# Altium PCB GeekIMU.PcbDoc
Units mil, origin at the board's own origin, x right, y up, seen from the top; angles counter-clockwise.
Board outline 1150.03 x 1090.03 mil, 2 copper layers (Top Layer, Bottom Layer); 41 components, 56 nets, 194 pads, 85 vias.
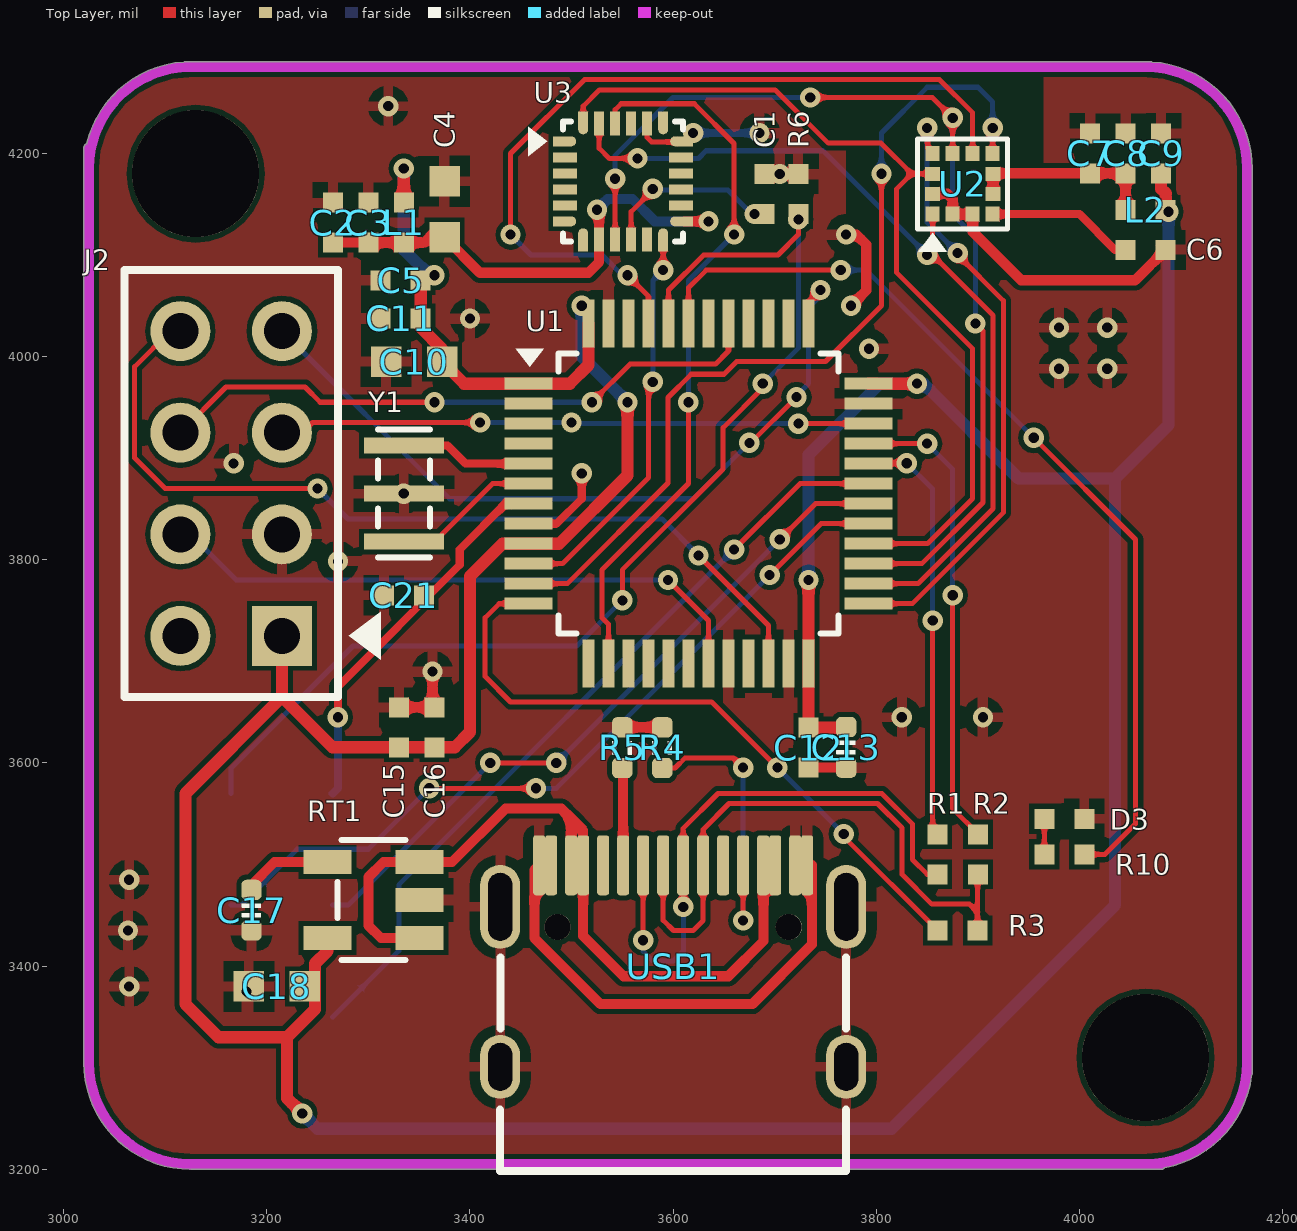
[diagram p0: Top Layer view]
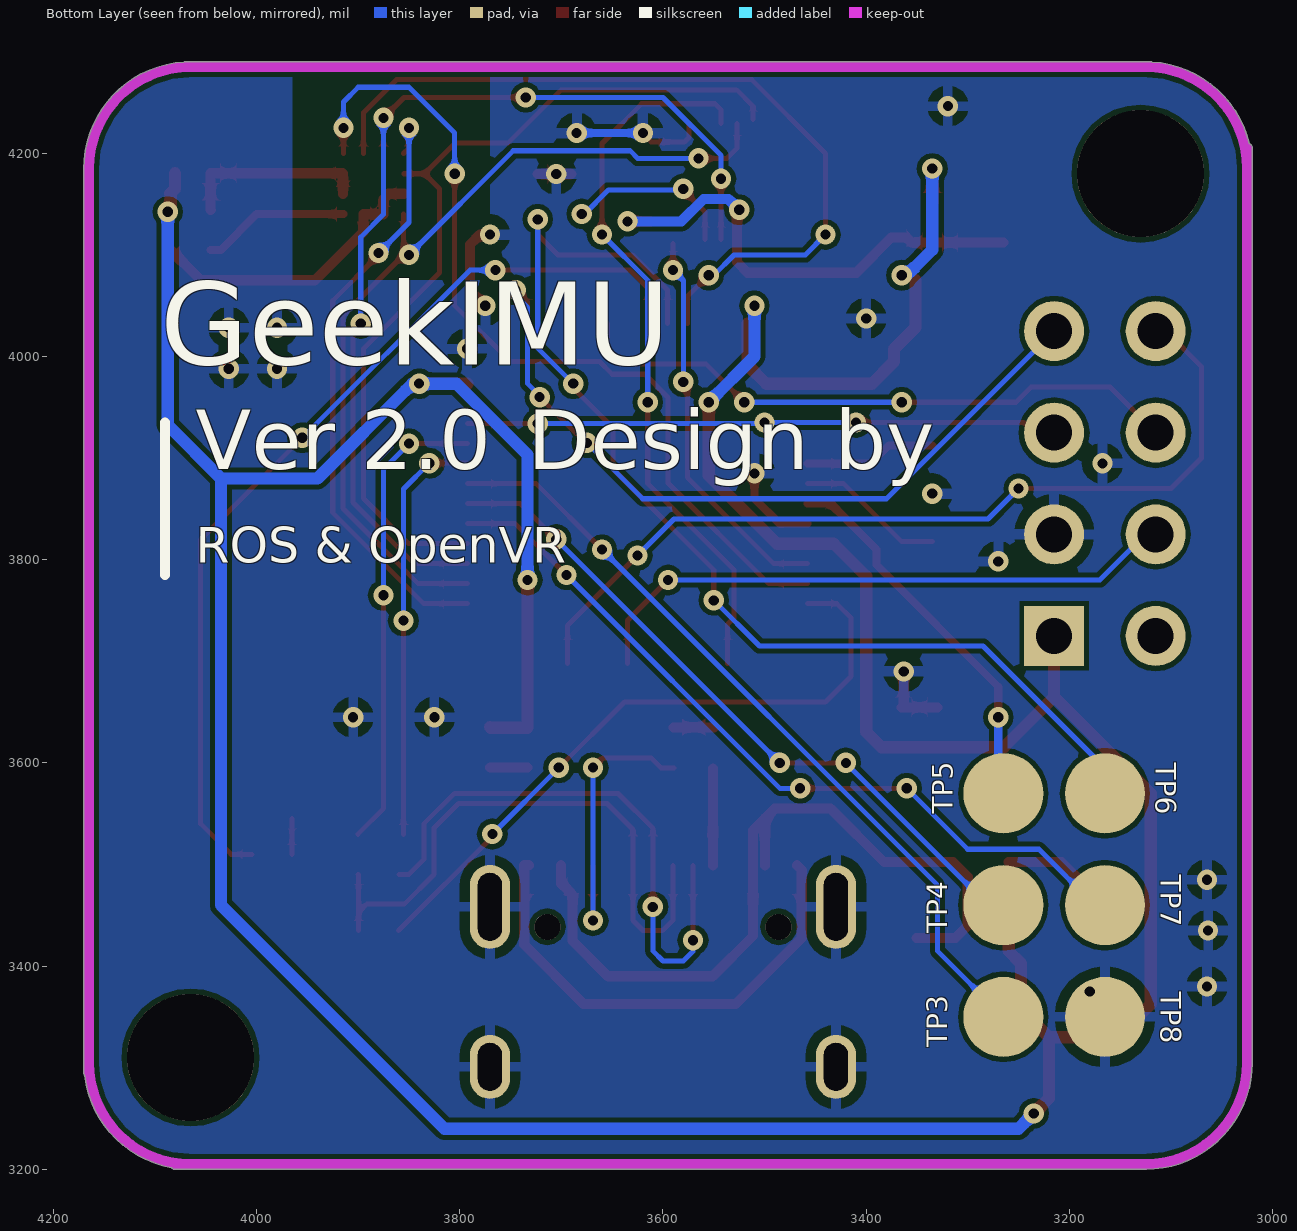
[diagram p1: Bottom Layer view, seen from below]
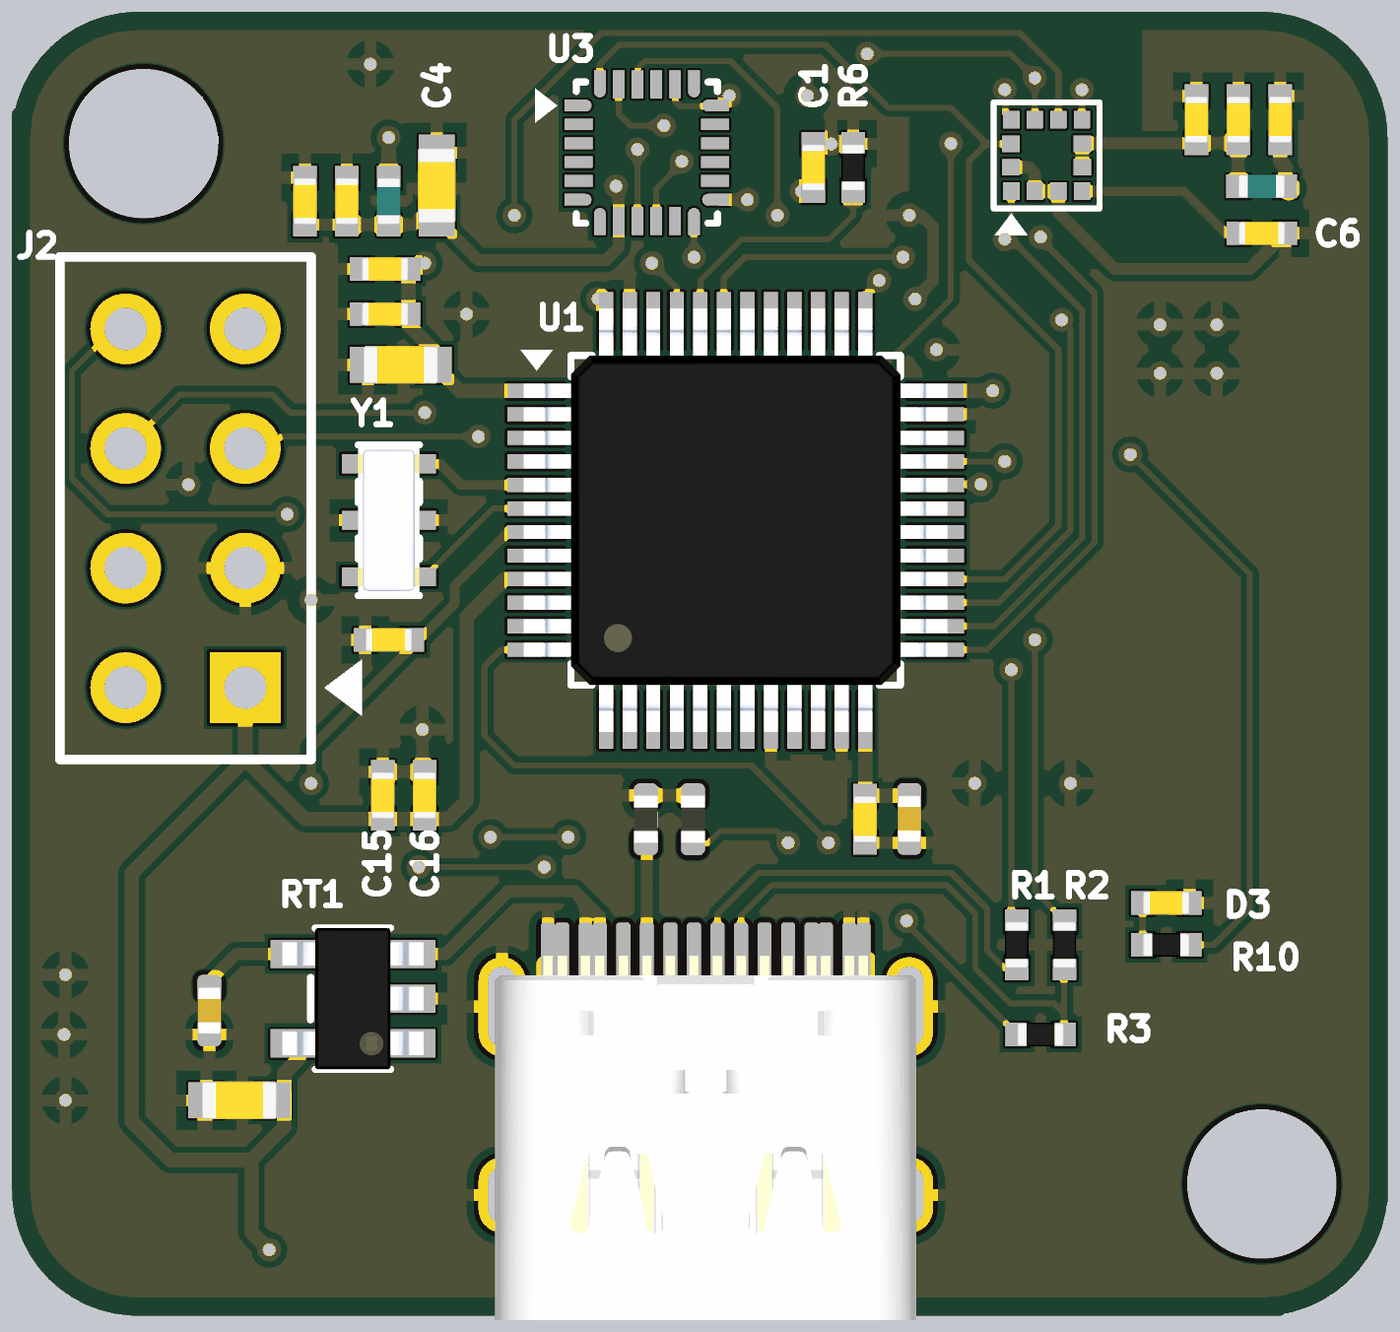
[diagram p2: 3D render of the assembled board from above, using the file's embedded part models]

## Layer stack, top to bottom
Top Solder: solder mask 0.4, Solder Resist, Dk 3.5
Top Layer: signal copper 1.4
Dielectric1: dielectric 12.6, FR-4, Dk 4.8
Bottom Layer: signal copper 1.4
Bottom Solder: solder mask 0.4, Solder Resist, Dk 3.5

## Board outline
3019.99,3305 3019.99,4205 cw(c3025,4205) 3022.9,4209.55 cw(c3125,4185) 3118.62,4289.82 cw(c3120,4285) 3120,4290.02 4070,4290.02 cw(c4070,4285) 4071.38,4289.82 cw(c4065,4185) 4170.02,4185 4170.02,3295 cw(c4165,3295) 4169.25,3292.34 cw(c4065,3305) 4083.75,3201.67 cw(c4080,3205) 4080,3199.99 3125,3199.99 cw(c3125,3305)

## Design rules (kind name [scope] priority, off if disabled: settings)
Clearance [All] p1: gap=5 ignorepadtopadclearanceinfootprint=FALSE except(0: Arc-Hole Track-Hole SMDPad-Hole THPad-Hole Via-Hole Fill-Hole Poly-Hole Region-Hole Text-Hole)
DiffPairsRouting [All] p1: maxlimit=20 minlimit=5 mostfreqgap=5 toplayer_minwidth=15 toplayer_maxwidth=15 toplayer_prefwidth=15 bottomlayer_minwidth=15 bottomlayer_maxwidth=15 bottomlayer_prefwidth=15 maxuncoupledlength=500
FabricationTestpoint [(IsPad And (OnTopLayer Or OnBottomLayer))] p1: side=3 testpointundercomponent=TRUE minsize=40 maxsize=100 preferedsize=60 minholesize=0 maxholesize=40 preferedholesize=32 testpointgrid=1 allowsidetop=TRUE allowsidebottom=TRUE usegrid=TRUE gridtolerance=0.01
HoleSize [All] p1: absolutevalues=TRUE maxlimit=135 minlimit=1 maxpercent=80.000 minpercent=20.000
MinimumSolderMaskSliver [All] p1: minsoldermaskwidth=1
PolygonConnect [All] p1: connectstyle=Relief reliefconductorwidth=10 reliefentries=4 polygonreliefangle="90 Angle" airgapwidth=10
RoutingVias [All] p1: holewidth=8 width=18 viastyle="Through Hole" minholewidth=8 minwidth=8 maxholewidth=50 maxwidth=50
SilkToSilkClearance [All] p1: silktosilkclearance=0
SilkToSolderMaskClearance SilkscreenOverComponentPads [IsPad] p1: minsilkscreentomaskgap=0 clearancetoexposedcopper=TRUE
SolderMaskExpansion [All] p1: expansion=4
Width [All] p1: maxlimit=30 minlimit=5 preferedwidth=10 minimp=50.000000 maximp=50.000000 favimp=50.000000
24 further rules are at their usual default settings.

## Classes and differential pairs
component class MCU: C10 C11 C12 C13 C15 C16 C21 D3 R6 R10 TP3 TP4 TP5 TP6 TP7 U1 Y1
component class Power: C17 C18 RT1
component class Sensor: C1 C2 C3 C4 C5 C6 C7 C8 C9 L1 L2 U2 U3
component class USB: J2 R1 R2 R3 R4 R5 TP8 USB1

## Components (designator, comment, footprint, x,y, rotation, side; value= is the part's Value field where it differs from the comment)
C1 "0.1uF" CAP_CERAMIC_0402 3690,4160 r90 top
C2 "0.01uF" CAP_CERAMIC_0402 3265,4131.81 r90 top
C3 "0.1uF" CAP_CERAMIC_0402 3299.95,4131.81 r90 top
C4 "10uF" CAP_CERAMIC_0603 3375,4144.84 r90 top
C5 "0.1uF" CAP_CERAMIC_0402 3331.86,4075 r180 top
C6 "0.1uF" CAP_CERAMIC_0402 4065,4105 r0 top
C7 "0.1uF" CAP_CERAMIC_0402 4010.31,4200 r90 top
C8 "1uF" CAP_CERAMIC_0402 4045.31,4200 r90 top
C9 "0.1uF" CAP_CERAMIC_0402 4080.31,4200 r90 top
C10 "10uF" CAP_CERAMIC_0603 3345,3995 r180 top
C11 "0.1uF" CAP_CERAMIC_0402 3331.86,4037.42 r180 top
C12 "0.1uF" CAP_CERAMIC_0402 3733.27,3615 r270 top
C13 "0.1uF" CAP_0402 3770.28,3615.32 r90 top
C15 "1uF" CAP_CERAMIC_0402 3330,3635 r90 top
C16 "0.1uF" CAP_CERAMIC_0402 3365,3635 r90 top
C17 "Cap" CAP_0402 3185,3455 r90 top value=0.1uf
C18 "Cap" CAP_0603 3210,3380 r0 top value=10uf
C21 "0.1uF" CAP_CERAMIC_0402 3335,3765 r180 top
D3 "LED1" CAP_CERAMIC_0402 3985,3545 r0 top
J2 "4-103240-0-04" 4-103240-0-04 3215,3725 r90 top
L1 "MMZ1005S601C" INDUCTOR_0402 3334.89,4131.81 r90 top
L2 "MMZ1005S601C" INDUCTOR_0402 4064.84,4144.21 r0 top
R1 "22 ohm" RESISTOR_0402 3860,3510 r90 top
R2 "22 ohm" RESISTOR_0402 3900,3510 r90 top
R3 "1.5K" RESISTOR_0402 3880,3435 r180 top
R4 "5.1K" RES_0402 3589.37,3615 r90 top
R5 "5.1K" RES_0402 3550,3615 r270 top
R6 "10K" RESISTOR_0402 3723.23,4160 r270 top
R10 "" RESISTOR_0402 3985,3510 r0 top value=10K
RT1 "RT9193" SOT23-5L 3305,3465 r180 top
TP3 "TEST POINT" TEST_POINT_PAD 3265,3350 r0 bottom
TP4 "TEST POINT" TEST_POINT_PAD 3265,3460 r0 bottom
TP5 "TEST POINT" TEST_POINT_PAD 3265,3570 r0 bottom
TP6 "TEST POINT" TEST_POINT_PAD 3165,3570 r90 bottom
TP7 "TEST POINT" TEST_POINT_PAD 3165,3460 r90 bottom
TP8 "TEST POINT" TEST_POINT_PAD 3165,3350 r180 bottom
U1 "STM32F103C8T6" LQFP48 3625,3865 r0 top
U2 "LIS3MDL" LGA-12 3885,4170 r90 top
U3 "MPU-6500" QFN-24 3550.79,4172.4 r0 top
USB1 "Type-C" Type-C-TOP 3600,3400 r270 top
Y1 "CSTCE8M00G55-R0" CSTCE 3335,3865 r90 top

## Footprints (in the part's own frame and the unit in brackets; to place one, negate y for a bottom-side part, rotate by r counter-clockwise, add the part's x,y. Pads: shape width x height; smd on the part's side, far side on the other; paste and mask are expansions set on the pad)
4-103240-0-04 [mm]
  rect 1.5x1.5 hole 0.9 mask+0.076: 1(0,0)
  round 1.5 hole 0.9 mask+0.076: 2(0,2.54) 3(2.54,0) 4(2.54,2.54) 5(5.08,0) 6(5.08,2.54) 7(7.62,0) 8(7.62,2.54)
  silkscreen extent -1.52,-2.48 9.15,3.94
CAP_0402 [mil]
  rrect50% 20x20 smd: 1(-20,0) 2(20,0)
  silkscreen extent -7,-9 7,9, body extent -20,-10 20,10, height 20
CAP_0603 [mil]
  rect 30x30 smd mask+2: 1(-27.56,0) 2(27.56,0)
  body extent -31,-16 31,16, height 22
CAP_CERAMIC_0402 [mm]
  rect 0.5x0.5 smd mask+0.051: 1(-0.5,0) 2(0.5,0)
  body extent -0.5,-0.25 0.5,0.25, height 0.56
CAP_CERAMIC_0603 [mil]
  rect 30x30 smd mask+2: 1(-27.56,0) 2(27.56,0)
  body extent -31,-16 31,16, height 22
CSTCE [mm]
  rect 0.4x2 smd mask+0.064: 1(-1.2,0) 2(0,0) 3(1.2,0)
  silkscreen extent -1.6,-0.65 1.6,0.65, body extent -1.6,-0.65 1.6,0.65, height 0.7
INDUCTOR_0402 [mm]
  rect 0.5x0.5 smd mask+0.051: 1(-0.5,0) 2(0.5,0)
  body extent -0.5,-0.25 0.5,0.25, height 0.6
LGA-12 [mm]
  rect 0.375x0.35 smd mask+0.051: 1(-0.76,0.75) 2(-0.76,0.25) 3(-0.76,-0.25) 4(-0.76,-0.75) 7(0.76,-0.75) 8(0.76,-0.25) 9(0.76,0.25) 10(0.76,0.75)
  rect 0.35x0.375 smd mask+0.051: 5(-0.25,-0.76) 6(0.25,-0.76) 11(0.25,0.76) 12(-0.25,0.76)
  silkscreen extent -1.7,-1.12 1.13,1.13, body extent -1,-1 1,1, height 1
LQFP48 [mm]
  rect 1.2x0.3 smd mask+0.064: 1(-4.25,2.75) 2(-4.25,2.25) 3(-4.25,1.75) 4(-4.25,1.25) 5(-4.25,0.75) 6(-4.25,0.25) 7(-4.25,-0.25) 8(-4.25,-0.75) 9(-4.25,-1.25) 10(-4.25,-1.75) 11(-4.25,-2.25) 12(-4.25,-2.75) 25(4.25,-2.75) 26(4.25,-2.25) 27(4.25,-1.75) 28(4.25,-1.25) 29(4.25,-0.75) 30(4.25,-0.25) 31(4.25,0.25) 32(4.25,0.75) 33(4.25,1.25) 34(4.25,1.75) 35(4.25,2.25) 36(4.25,2.75)
  rect 0.3x1.2 smd mask+0.064: 13(-2.75,-4.25) 14(-2.25,-4.25) 15(-1.75,-4.25) 16(-1.25,-4.25) 17(-0.75,-4.25) 18(-0.25,-4.25) 19(0.25,-4.25) 20(0.75,-4.25) 21(1.25,-4.25) 22(1.75,-4.25) 23(2.25,-4.25) 24(2.75,-4.25) 37(2.75,4.25) 38(2.25,4.25) 39(1.75,4.25) 40(1.25,4.25) 41(0.75,4.25) 42(0.25,4.25) 43(-0.25,4.25) 44(-0.75,4.25) 45(-1.25,4.25) 46(-1.75,4.25) 47(-2.25,4.25) 48(-2.75,4.25)
  silkscreen extent -4.58,-3.5 3.5,3.62, body extent -4.5,-4.5 4.5,4.5, height 1.5
QFN-24 [mm]
  rect 0.4x0.25 smd mask+0.05: 1(-1.55,1) 6(-1.55,-1) 13(1.55,-1) 18(1.55,1)
  rrect100% 0.35x0.25 smd mask+0.05: 1(-1.35,1) 6(-1.35,-1) 13(1.35,-1) 18(1.35,1)
  rect 0.6x0.25 smd mask+0.05: 2(-1.45,0.6) 3(-1.45,0.2) 4(-1.45,-0.2) 5(-1.45,-0.6) 14(1.45,-0.6) 15(1.45,-0.2) 16(1.45,0.2) 17(1.45,0.6)
  rect 0.25x0.4 smd mask+0.05: 7(-1,-1.55) 12(1,-1.55) 19(1,1.55) 24(-1,1.55)
  rrect100% 0.25x0.35 smd mask+0.05: 7(-1,-1.35) 12(1,-1.35) 19(1,1.35) 24(-1,1.35)
  rect 0.25x0.6 smd mask+0.05: 8(-0.6,-1.45) 9(-0.2,-1.45) 10(0.2,-1.45) 11(0.6,-1.45) 20(0.6,1.45) 21(0.2,1.45) 22(-0.2,1.45) 23(-0.6,1.45)
  silkscreen extent -2.37,-1.5 1.5,1.5, body extent -1.5,-1.5 1.5,1.5, height 0.9
RES_0402 [mil]
  rrect50% 20x20 smd: 1(-20,0) 2(20,0)
  silkscreen extent -7,-10 7,10, body extent -20,-10 20,10, height 14
RESISTOR_0402 [mm]
  rect 0.5x0.5 smd mask+0.051: 1(-0.5,0) 2(0.5,0)
  body extent -0.5,-0.25 0.5,0.25, height 0.38
SOT23-5L [mm]
  rect 1.2x0.6 smd mask+0.051: 1(-1.15,0.95) 2(-1.15,0) 3(-1.15,-0.95) 4(1.15,-0.95) 5(1.15,0.95)
  silkscreen extent -0.8,-1.5 0.9,1.5, body extent -1.5,-1.5 1.5,1.5, height 1.3
TEST_POINT_PAD [mm]
  round 2 smd mask+0.064: 1(0,0)
Type-C-TOP [mm]
  round 0.65 hole 0.65: 0(-0.98,2.89) 0(-0.98,-2.89)
  oval 1.6x1 hole 0.6 slot 1.2 at 0 deg: 1(2.52,4.325) 2(2.52,-4.325)
  oval 2.1x1 hole 0.6 slot 1.7 at 0 deg: 3(-1.48,-4.325) 4(-1.48,4.325)
  rrect50% 1.5x0.3 smd: A1(-2.52,-3.35) A4(-2.52,-2.55) A5(-2.52,-1.25) A6(-2.52,-0.25) A7(-2.52,0.25) A8(-2.52,1.25) A9(-2.52,2.55) A12(-2.52,3.35) B1(-2.52,3.05) B4(-2.52,2.25) B5(-2.52,1.75) B6(-2.52,0.75) B7(-2.52,-0.75) B8(-2.52,-1.75) B9(-2.52,-2.25) B12(-2.52,-3.05)
  silkscreen extent -0.22,-4.33 5.12,4.33, body extent -2.57,-4.48 5.18,4.47, height 3.26

## Part data
C1 C3 C5 C6 C7 C9 C11 C12 C13 C16 C21: library part "CAP, CERAMIC", "CAP, CERAMIC, 0.1uF, ?0%, 16V, X7R, 0402", Dielectric=X7R, Manufacturer="MURATA ELECTRONICS", Package=0402, Part Number=GRM155R71C104KA88D, Tolerance=?0%, Voltage=16V
C2: library part "CAP, CERAMIC", "CAP, CERAMIC, 0.01uF, ?0%, 25V, X7R, 0402", Dielectric=X7R, Manufacturer="MURATA ELECTRONICS", Package=0402, Part Number=GRM155R71E103KA01D, Tolerance=?0%, Voltage=25V
C4 C10: library part "CAP, CERAMIC", "CAP, CERAMIC, 10uF, ?0%, 6.3V, X5R, 0603", Dielectric=X5R, Manufacturer="MURATA ELECTRONICS", Package=0603, Part Number=GRM188R60J106ME47D, Tolerance=?0%, Voltage=6.3V
C8 C15: library part "CAP, CERAMIC", "CAP, CERAMIC, 1uF, ?0%, 10V, X5R, 0402", Dielectric=X5R, Manufacturer="MURATA ELECTRONICS", Package=0402, Part Number=GRM155R61A105KE15D, Tolerance=?0%, Voltage=10V
C17 C18: "Capacitor", LatestRevisionDate=17-Jul-2002, LatestRevisionNote="Re-released for DXP Platform.", PackageDescription="Radial Cap, Thru-Hole; 2 Leads; 0.3 in Pin Spacing", PackageReference=RAD-0.3, Published=8-Jun-2000, Publisher="Altium Limited"
D3: "Typical RED GaAs LED", LatestRevisionDate=08-Jul-2005, LatestRevisionNote="Mech Layer 1 removed.", PackageReference=LED-1, Published=8-Jun-2000, Publisher="Altium Limited"
J2: "CONNECTOR, HEADER, 2X4, 0.1\" PITCH", Manufacturer="TE CONNECTIVITY", Part Number=4-103240-0-04, Pitch="0.1\""
L1 L2: library part INDUCTOR, "FERRITE CHIP BEAD, 600 OHM @ 100MHz, 300mA, 0402", Manufacturer="TDK CORPORATION", Package=0402, Part Number=MMZ1005S601C
R1 R2: library part RESISTOR, "RES, 22 OHM, 1/10W, ?%, 0402", Manufacturer=PANASONIC, Package=0402, Part Number=ERJ-2RKF22R0X, Power Rating=1/10W, Tolerance=?%
R3: library part RESISTOR, "RES, 1.5K OHM, 1/10W, ?%, 0402", Manufacturer=PANASONIC, Package=0402, Part Number=ERJ-2RKF1501X, Power Rating=1/10W, Tolerance=?%
R4: library part RESISTOR, "RES, 1.5K OHM, 1/10W, ?%, 0402", Manufacturer=PANASONIC, Package=0402, Part Number=ERJ-2RKF1501X, Power Rating=1/10W, Tolerance=10%
R5: library part RESISTOR, "RES, 1.5K OHM, 1/10W, ?%, 0402", Manufacturer=PANASONIC, Package=0402, Part Number=ERJ-2RKF1501X, Power Rating=1/10W, 误差=10%
R6: library part RESISTOR, "RES, 10K OHM, 1/10W, ?%, 0402", Manufacturer=PANASONIC, Package=0402, Part Number=ERJ-2RKF1002X, Power Rating=1/10W, Tolerance=?%
R10: library part Res2, "Resistor", LatestRevisionDate=17-Jul-2002, LatestRevisionNote="Re-released for DXP Platform.", PackageReference=AXIAL-0.4, Published=8-Jun-2000, Publisher="Altium Limited"
RT1: "Power"
TP3 TP4 TP5 TP6 TP7 TP8: library part TEST_POINT
U1: "IC, STM32 MICROCONTROLLER, ARM CORTEX M3", Manufacturer="ST MICROELECTRONICS", Part Number=STM32F103C8T6
U2: "IC, MEMS 3 AXIS MAGNETOMETER", Manufacturer=STMICROELECTRONICS, Part Number=LIS3MDLTR
U3: "IC, MEMS 3 AXIS GYROSCOPE AND 3 AXIS ACCELEROMETER", Manufacturer=INVENSENSE, Part Number=MPU-6500
USB1: library part USB-Type-C-TOP-16P, "16脚USB TypeC"
Y1: "CERAMIC RESONATOR, 8MHz, +/-0.2%, 33pF, SMD", Manufacturer="MURATA ELECTRONICS", Part Number=CSTCE8M00G55-R0

## Free pads (board coordinates)
  round 125 hole 125 unplated: 0(3130,4180) 0(4065,3310)

## Via types
v1: diameter 20/20 (per signal layer), hole 10, Top Layer to Bottom Layer, tented both sides, 85 vias

## Nets (pads, with @x,y where several pads share a name; then routed paths per layer and width w, separated by ;. In a path a pad name is that pad's centre, name@x,y a point inside that pad or via, vN(x,y) a via of type N, cw(c..) or ccw(c..) an arc to the next point about the centre after c; other vN are vias at no path point)
3.3V: C5.1 C9.1 C10.1 C11.1 C12.1 C13.2 C15.1 C16.1 C18.2 J2.1 L1.2 L2.2 RT1.5 U1.1 U1.9 U1.24 U1.36 U1.48 | length 4254.3
  Top Layer w12: J2.1 3215,3665 ; v1(3235,3255) 3220,3270 3220,3330 ; RT1.5 3259.72,3414.72 3247.56,3402.56 3247.56,3357.56 3220,3330 ; L1.2 3334.9,4175 ; C5.1 C11.1 3351.55,4028.45 3372.56,4007.44 C10.1 3394.29,3973.27 U1.1 3498.27,3973.27 3516.73,3991.73 U1.48 ; v1(3555,3955) 3555,3882.99 3487.79,3815.79 U1.9 3432,3815.79 3400,3783.79 3400,3630.32 3385,3615.32 C16.1 C15.1 3264.68,3615.32 3215,3665 ; v1(3733.27,3780) U1.24 C12.1 3769.64,3634.68 C13.2 ; U1.36 v1(3840,3973.27) ; C9.1 4080.31,4165 4085,4160.31 4084.53,4159.84 L2.2 ; 3215,3665 3120,3570 3120,3362.56 3152.56,3330 3220,3330
  Bottom Layer w12: v1(3235,3255) 3250,3240 3815,3240 4035,3460 4035,3880 ; v1(3334.9,4185) 3334.9,4105.1 3360,4080 v1(3365,4080) ; v1(3510,4050) 3510,4000 v1(3555,3955) ; v1(3733.27,3780) 3733.27,3903.27 3803.27,3973.27 v1(3840,3973.27) 3846.73,3973.27 3940,3880 4035,3880 ; v1(4087.5,4142.5) 4087.5,3932.5 4035,3880
AUX_CL: U3.7
AUX_DA: U3.21
BOOT0: R6.2 TP6.1 U1.44 | length 1128.9
  Top Layer w5: v1(3550,3760) 3550,3790 3649.21,3889.21 3649.21,3930 3688.27,3969.05 v1(3688.27,3973.27) ; U1.44 3595.47,4065.47 3630,4100 3703.23,4100 3723.23,4120 v1(3723.23,4135) R6.2
  Bottom Layer w5: TP6.1 3165,3595 3285,3715 3505,3715 v1(3550,3760) ; v1(3688.27,3973.27) 3723.23,4008.23 v1(3723.23,4135)
D+: R2.1 R3.1 USB1.A6 USB1.B6 | length 598.7
  Top Layer w5: USB1.A6 3590.16,3445.16 3600.31,3435 3619.68,3435 3629.53,3444.84 USB1.B6 3629.53,3534.53 3655,3560 3801.25,3560 3825.39,3535.86 3825.39,3490.24 3854.63,3461 3891.5,3461 3899.68,3452.82 ; R3.1 3899.68,3452.82 ; R2.1 3899.68,3490 3899.68,3452.82
D-: R1.1 USB1.A7 USB1.B7 | length 570.9
  Top Layer w5: v1(3570.47,3425.47) USB1.B7 ; v1(3610,3458.27) 3610,3499.05 USB1.A7 3609.84,3535.63 3644.21,3570 3805.39,3570 3835.39,3540 3835.39,3505.01 3850.09,3490.32 R1.1
  Bottom Layer w5: v1(3570.47,3425.47) 3570.47,3414.53 3580,3405 3600,3405 3610,3415 v1(3610,3458.27)
FSYNC: U3.11
GND: C1.2 C2.2 C3.2 C4.2 C5.2 C6.2 C7.2 C8.2 C9.2 C10.2 C11.2 C12.2 C13.1 C15.2 C16.2 C17.1 C18.1 C21.2 D3.2 J2.3 R4.2 R5.1 R6.1 RT1.2 TP8.1 U1.8 U1.20 U1.23 U1.35 U1.47 U2.2 U2.3 U2.12 U3.18 U3.20 USB1.1 USB1.2 USB1.3 USB1.4 USB1.A1 USB1.A12 USB1.B1 USB1.B12 Y1.2 | length 1254.2
  Top Layer w5: U3.20 3574.41,4215.59 3578.84,4211.16 3611.81,4211.16 U3.18@3611.81,4211.77
  Top Layer w8: U1.8 3485.47,3835.47 3510,3860 v1(3510,3885)
  Top Layer w10: C15.2 C16.2 3363.07,3656.61 v1(3363.07,3690) ; USB1.A1 3463.43,3494.53 3463.43,3427.68 3528.54,3362.56 3677.95,3362.56 3736.57,3421.18 3736.57,3499.21 USB1.A12 ; R5.1 R4.2 ; C1.2 R6.1 ; C12.2 C13.1 ; v1(3770.28,4120) 3780.25,4120 3790,4110.25 3790,4065 v1(3775,4050) ; U2.12 3869.84,4160.16 3875.16,4154.84 U2.2 U2.3 3894.84,4122.66 3942.5,4075 4054.68,4075 C6.2
  Bottom Layer w8: v1(3619.68,4220) v1(3685,4220)
  other v1: 3180,3375 3064.59,3380 3063.48,3435 3064.59,3485 3825,3645 3905,3645 3270.09,3798.36 3334.9,3865 3167.44,3894.84 3979.84,3987.94 4027.32,3987.94 3792.8,4007.66 3979.84,4028.45 4027.32,4028.45 3400,4037.42 3705,4179.69 3319.6,4246.42
GYRO_CS: U1.14 U3.22 | length 717.7
  Top Layer w5: U1.14 3536.42,3736.46 3530,3742.88 3530,3790 3615,3875 v1(3615,3955) ; U3.22 3542.91,4242.91 3548.8,4248.8 3620.89,4248.8 3660,4209.69 v1(3660,4120)
  Bottom Layer w5: v1(3615,3955) 3615,4075 v1(3660,4120)
GYRO_IRQ: U1.10 U3.12 | length 389.7
  Top Layer w5: U1.10 3491.1,3796.1 3575.79,3880.79 3575.79,3970.79 v1(3580,3975) ; v1(3590.16,4085) U3.12@3590.16,4111.38
  Bottom Layer w5: v1(3580,3975) 3580,4074.84 v1(3590.16,4085)
ICLK: U1.21
IDATA: J2.8 U1.22 | length 879.2
  Top Layer w5: J2.8 3105,4025 3070,3990 3070,3900 3100,3870 v1(3250,3870) ; v1(3625,3804.21) 3693.9,3735.31 U1.22
  Bottom Layer w5: v1(3250,3870) 3280,3840 3589.21,3840 v1(3625,3804.21)
IO0: U1.18
IO1: J2.4 U1.19 | length 597.5
  Top Layer w5: v1(3595,3780) 3634.84,3740.16 U1.19
  Bottom Layer w5: J2.4 3125,3825 3170,3780 v1(3595,3780)
IO3: U1.40
IO4: J2.6 U1.41 | length 612.2
  Top Layer w5: J2.6 3160,3970 3237.56,3970 3252.56,3955 v1(3365.04,3955) ; v1(3520,3955) 3557.5,3992.5 3641.71,3992.5 3654.53,4005.32 U1.41
  Bottom Layer w5: v1(3365.04,3955) v1(3520,3955)
LIS3MDL_VDDIO: C7.1 C8.1 L2.1 U2.5 U2.6 | length 186.4
  Top Layer w10: U2.5 U2.6 3915.39,4180.32 C7.1 C8.1 4045.31,4144.37 L2.1
MAG_CS: U1.25 U2.10 | length 606.9
  Top Layer w5: U1.25 3835.4,3756.73 3925,3846.33 3925,4055 3880,4100 v1(3880,4101.85) ; v1(3850,4225) 3850.31,4224.69 3850.31,4205.08 U2.10
  Bottom Layer w5: v1(3850,4225) 3850,4131.85 v1(3880,4101.85)
MAG_DRDY: U1.45 U2.8 | length 806.1
  Top Layer w5: v1(3440,4120) 3440,4199.84 3512.66,4272.5 3862.25,4272.5 3894.84,4239.91 U2.8 ; v1(3555,4080) 3575.79,4059.21 U1.45
  Bottom Layer w5: v1(3440,4120) 3460,4100 3530,4100 3550,4080 v1(3555,4080)
MAG_IRQ: U1.11 U2.7 | length 864.7
  Top Layer w5: U1.11 3495.82,3776.42 3595,3875.59 3595,3959.75 3617.75,3982.5 3650,3982.5 3662.5,3995 3750,3995 3805,4050 v1(3805,4179.92) ; U2.7 v1(3914.53,4225)
  Bottom Layer w5: v1(3805,4179.92) 3805,4220 3850,4265 3900,4265 3914.53,4250.47 v1(3914.53,4225)
MAG_SOC: U1.46
MEMS_MISO: U1.27 U2.9 U3.9 | length 1010.4
  Top Layer w5: U3.9 v1(3542.91,4175) ; v1(3735,4255) 3855,4255 v1(3875.16,4234.84) U2.9 ; U1.27 3844.77,3796.1 3905,3856.33 3905,4025 v1(3897.5,4032.5)
  Bottom Layer w5: v1(3542.91,4175) 3542.91,4197.99 3599.92,4255 v1(3735,4255) ; v1(3875.16,4234.84) 3875.16,4140.16 3875,4140 3897.5,4117.5 v1(3897.5,4032.5)
MEMS_MOSI: U1.28 U2.11 U3.24 | length 875.2
  Top Layer w5: U3.24@3511.42,4233.43 3511.42,4246.42 3527.5,4262.5 3700.26,4262.5 3752.76,4210 3804.68,4210 3834.84,4179.84 ; U1.28 3850.31,3815.79 3894.84,3860.32 3894.84,4007.66 3820,4082.5 3820,4165 3834.84,4179.84 ; U2.11 3834.84,4179.84
MEMS_SCK: U1.26 U2.1 U3.23 | length 873.2
  Top Layer w5: U3.23 3527.17,4205 3537.17,4195 v1(3565,4195) ; U1.26 3840.95,3776.42 3915,3850.47 3915,4040.47 v1@3855.47,4100 ; v1(3850,4100) v1@3855.47,4100 ; U2.1 v1@3855.47,4100
  Bottom Layer w5: v1@3567.18,4197.19 v1(3565,4195) 3624.84,4195 3632.34,4202.5 3747.5,4202.5 v1(3850,4100)
MPU6500_VDDIO: C2.1 C3.1 C4.1 L1.1 U3.8 U3.13 | length 481.7
  Top Layer w10: C2.1 C3.1 L1.1 3355.75,4112.13 3360.91,4117.28 C4.1 3409.78,4082.5 3516.73,4082.5 3527.17,4092.93 U3.8 3527.17,4142.2 v1(3525,4144.37) ; U3.13@3611.81,4133.03 v1(3634.84,4133.03)
  Bottom Layer w10: v1(3525,4144.37) 3535.63,4155 3560,4155 3581.97,4133.03 v1(3634.84,4133.03)
NC1: U3.1
NC2: U3.2
NC3: U3.3
NC4: U3.4
NC5: U3.5
NC6: U3.6
NC7: U3.14
NC8: U3.15
NC9: U3.16
NC10: U3.17
NetC1_1: C1.1 U3.10 | length 169.5
  Top Layer w5: U3.10 3558.66,4142.44 3580,4163.78 v1(3580,4165)
  Bottom Layer w5: v1(3580,4165) 3580,4163.78 3653.78,4163.78 3677.24,4140.31 v1(3680,4140.31)
NetC6_1: C6.1 U2.4 | length 145.3
  Top Layer w8: U2.4 3999.92,4140.08 4035,4105 C6.1
NetC17_2: C17.2 RT1.4 | length 84.1
  Top Layer w10: C17.2@3185,3479.69 3207.72,3502.4 RT1.4
NetD3_1: D3.1 R10.1 | length 35
  Top Layer w5: R10.1 D3.1
NetR4_1: R4.1 USB1.B5 | length 292.5
  Top Layer w5: R4.1 3601.81,3595 3611.81,3605 3659.21,3605 v1(3668.9,3595.31) ; v1(3668.9,3444.84) USB1.B5
  Bottom Layer w5: v1(3668.9,3444.84) v1(3668.9,3595.31)
NetR5_2: R5.2 USB1.A5 | length 96.1
  Top Layer w5: R5.2 R5.2@3550.79,3594.21
  Top Layer w10: USB1.A5 R5.2@3550.79,3594.21
NRST: C21.1 TP5.1 U1.7 | length 378.3
  Top Layer w8: v1(3270,3645) 3270,3675 3390,3795 3390,3810.22 3434.94,3855.16 U1.7
  Bottom Layer w8: TP5.1 3270,3575 v1(3270,3645)
OSC_IN: U1.5 Y1.3 | length 130
  Top Layer w8: Y1.3 3377.75,3912.25 3395.47,3894.53 U1.5
OSC_OUT: U1.6 Y1.1 | length 146.3
  Top Layer w5: Y1.1 3365.04,3817.76 3422.12,3874.84 U1.6
RESV: U3.19
RUN_STATE: R10.2 U1.43 | length 934.9
  Top Layer w5: U1.43 3615.16,4067.66 3632.5,4085 v1(3765,4085) ; v1(3955,3920) 4055,3820 4055,3540 4025,3510 R10.2
  Bottom Layer w5: v1(3765,4085) 3790,4085 v1(3955,3920)
RX: TP3.1 U1.31 | length 782.8
  Top Layer w5: v1(3660,3810) 3724.84,3874.84 U1.31
  Bottom Layer w5: TP3.1 3330,3415 3330,3480 v1(3660,3810)
SWCLK: J2.7 U1.37 | length 769.4
  Top Layer w5: v1(3675,3915) 3676.42,3915 v1(3721.42,3960) ; U1.37 3733.27,4053.74 v1(3745,4065.47)
  Bottom Layer w5: J2.7 3380,3860 3620,3860 v1(3675,3915) ; v1(3721.42,3960) 3721.42,3961.49 3733.23,3973.31 3733.23,4048.23 3745,4060 v1(3745,4065.47)
SWDIO: J2.5 U1.34 | length 581.9
  Top Layer w5: J2.5 3235,3925 3245,3935 v1(3410,3935) ; v1(3723.23,3933.9) U1.34
  Bottom Layer w5: v1(3410,3935) v1(3500,3935) 3501.1,3933.9 v1(3723.23,3933.9)
SWO: U1.39
TX: TP4.1 U1.30 | length 691
  Top Layer w5: v1(3420,3600) v1(3485,3600) ; v1(3705,3820) 3740.16,3855.16 U1.30
  Bottom Layer w5: TP4.1 3280,3460 v1(3420,3600) ; v1(3485,3600) v1(3705,3820)
UARTEN: TP7.1 U1.29 | length 782.8
  Top Layer w5: v1(3360,3575) v1(3465,3575) ; v1(3695,3785) 3745.47,3835.47 U1.29
  Bottom Layer w5: TP7.1 3175,3460 3230,3515 3300,3515 v1(3360,3575) ; v1(3465,3575) 3485,3575 v1(3695,3785)
USBDM: R1.2 U1.32 | length 413.7
  Top Layer w5: U1.32 3792.8,3895 v1(3830,3895) ; R1.2@3855.47,3529.68 v1(3855.47,3740)
  Bottom Layer w5: v1(3830,3895) 3855.47,3869.53 v1(3855.47,3740)
USBDP: R2.2 U1.33 | length 462.9
  Top Layer w5: U1.33 v1(3850,3914.21) ; v1(3875.16,3765) 3875.16,3555 3900,3530.16 R2.2
  Bottom Layer w5: v1(3850,3914.21) 3875.16,3889.05 v1(3875.16,3765)
USBDP_PU: R3.2 U1.12 | length 656.7
  Top Layer w5: U1.12 3428.86,3756.73 3415,3742.88 3415,3685 3440,3660 3637.91,3660 v1(3702.6,3595.31) ; v1(3767.91,3530) 3767.91,3527.4 R3.2
  Bottom Layer w5: v1(3702.6,3595.31) v1(3767.91,3530)
VCC: RT1.1 RT1.3 USB1.A4 USB1.A9 USB1.B4 USB1.B9 | length 788.8
  Top Layer w10: RT1.1 3312.4,3427.6 3300,3440 3300,3487.56 3314.84,3502.4 RT1.3 3382.4,3502.4 3435,3555 3490,3555 3499.61,3545.39 ; USB1.A4 3499.61,3545.39 ; USB1.A9 3700.39,3481.5 3688.9,3470 3688.9,3424.69 3654.21,3390 3551.1,3390 3511.42,3429.68 USB1.B9 3511.42,3533.58 3499.61,3545.39
pads on no net: J2.2 U1.2 U1.3 U1.4 U1.13 U1.15 U1.16 U1.17 U1.38 U1.42 USB1.0 USB1.A8 USB1.B8

## Polygon pours and split planes (outlines as drawn)
GND on Bottom Layer "Bottom Layer-GND" (solid, pour order 1007): 3110,4285 3770,4285 3770,4080 3775,4075 3965,4075 3965,4280 3970,4285 4085,4285 4095,4280 4100,4280 4110,4280 4155,4235 4160,4215 4165,4205 4165,3275 4150,3260 4150,3245 4145,3245 4110,3210 3095,3210 3090,3215 3075,3215 3040,3250 3040,3255 3030,3265 3030,3285 3025,3290 3025,4210 3035,4220 3035,4235 3075,4275 3085,4275
GND on Top Layer "Top Layer-GND" (solid, pour order 1011): 3135,4285 3770,4285 3770,4075.28 3770.28,4075 3965,4075 3965,4285 4100,4285 4120,4265 4130,4265 4155,4240 4155,4216.77 4160,4211.77 4155,4206.77 4155,3255 4125,3225 4120,3225 4100,3205 3100,3205 3090,3215 3075,3215 3035,3255 3035,3270 3025,3280 3025,4210 3035,4220 3035,4240 3050,4255 3050,4250 3080,4280 3090,4280

## Keep-outs
Keep-Out Layer:
  lines w10: 3025,4185 cw(c3125,4185) 3125,4285 ; 3025,4205 3025,3305 ccw(c3125,3305) 3125,3205 4080,3205 ; 3120,4285 4070,4285 ; 4065,3205 ccw(c4065,3305) 4165,3305 ; 4065,4285 cw(c4065,4185) 4165,4185 4165,3295

## Silkscreen, mask and mechanical layers (free items; w line width, h text height)
Bottom Overlay:
  lines w10: 4090,3785 4090,3935
  text "GeekIMU" at 4095,3965 h140
  text "Design by" at 3733.27,3870 h100
  text "Ver 2.0" at 4060,3870 h100
  text "ROS & OpenVR" at 4060,3785 h60